# Altium PCB Digital temperature converter.PcbDoc
Units mm, origin at the board's own origin, x right, y up, seen from the top; angles counter-clockwise.
Board outline 40 x 25 mm, 2 copper layers (Top Layer, Bottom Layer), stack 1.65 mm thick; 8 components, 7 nets, 27 pads, 0 vias.
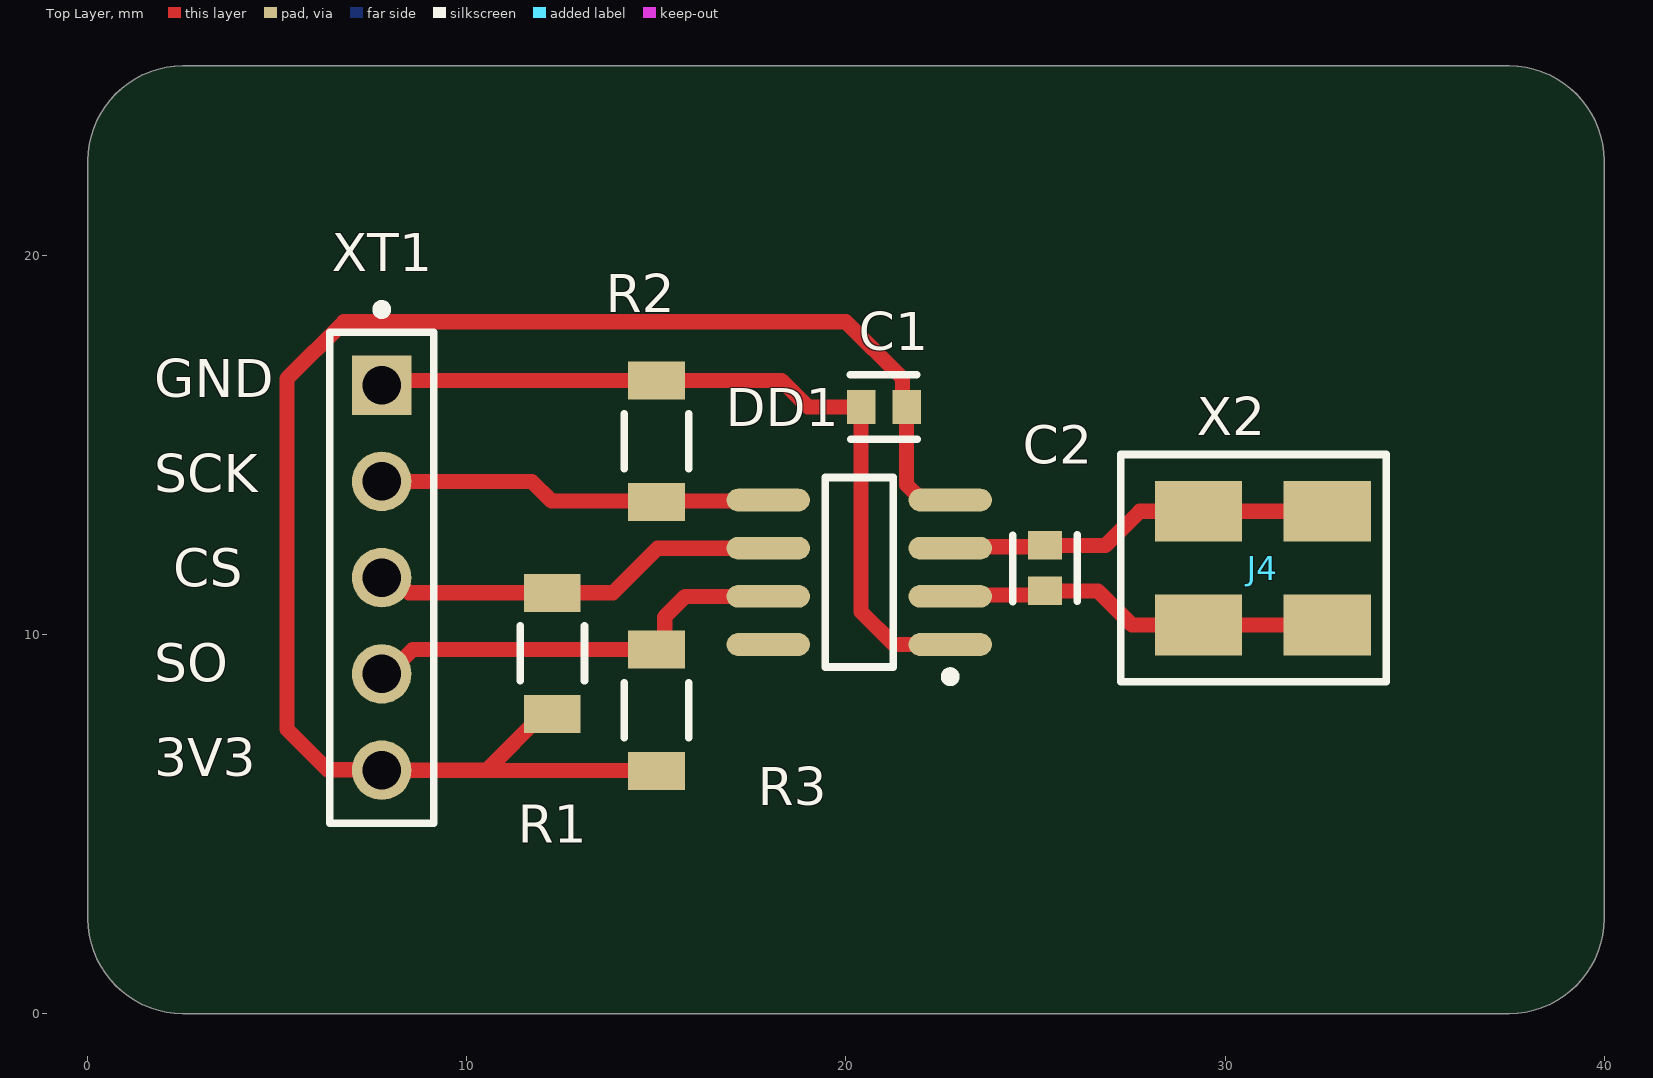
[diagram p0: Top Layer view]
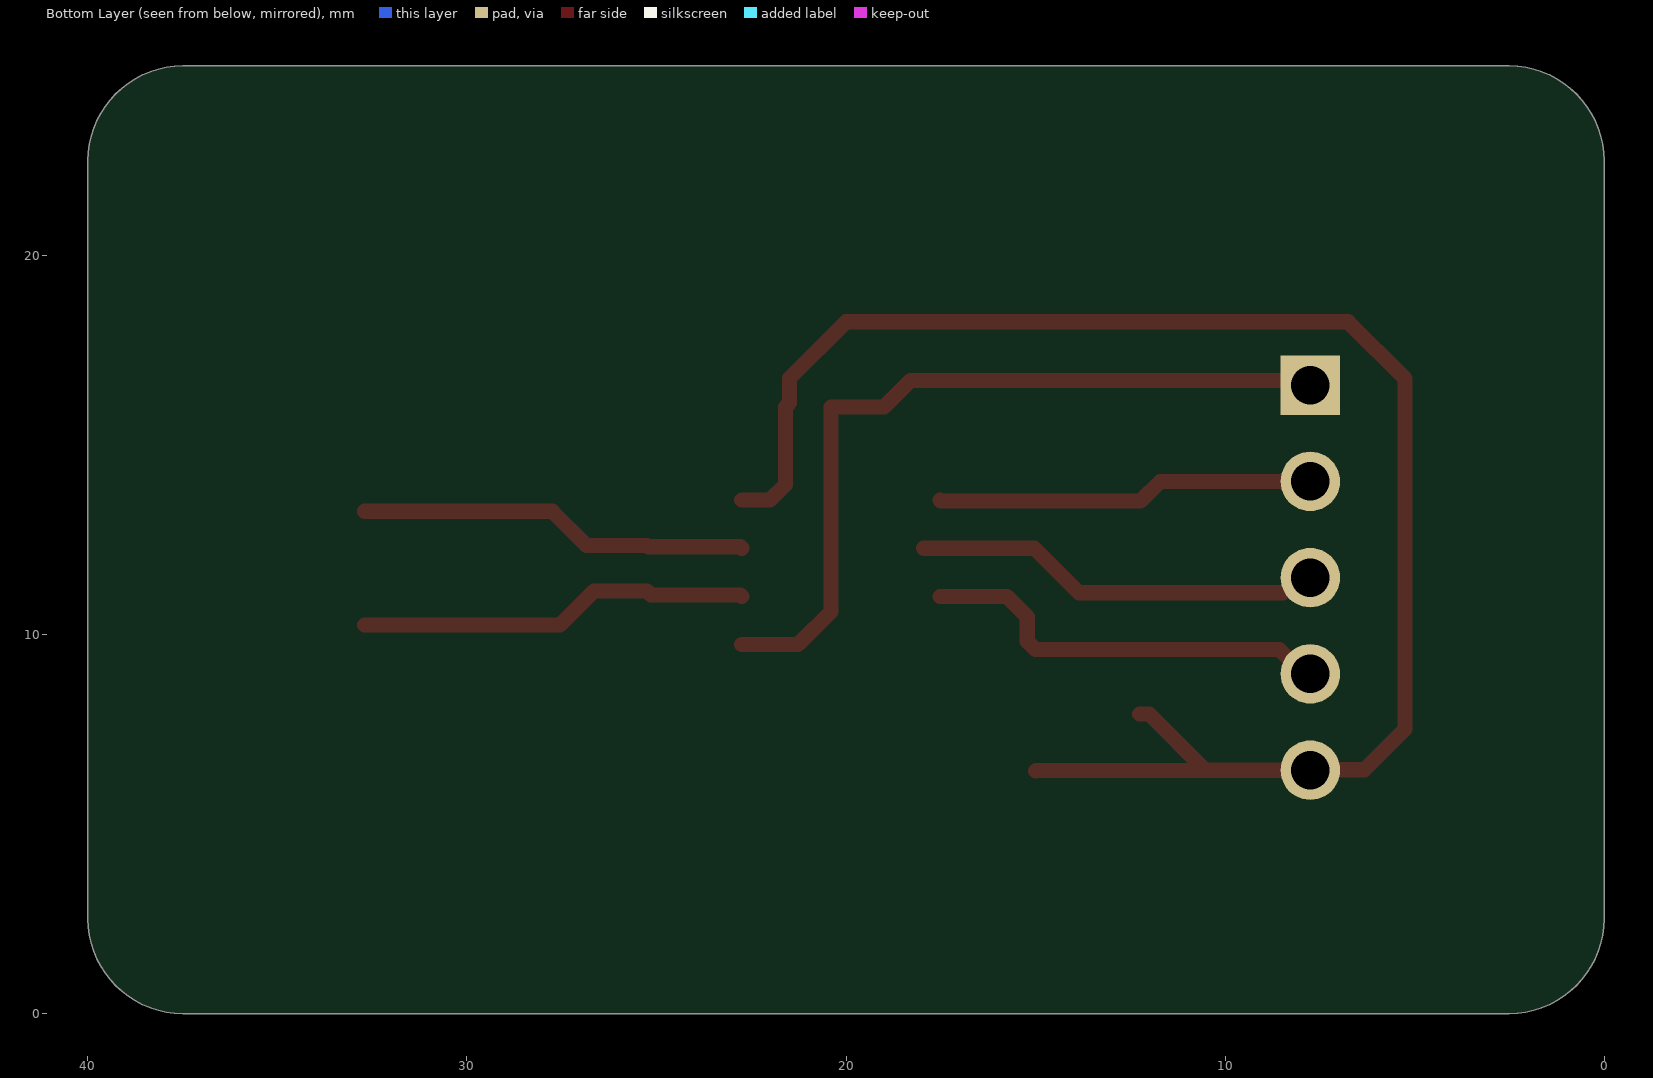
[diagram p1: Bottom Layer view, seen from below]
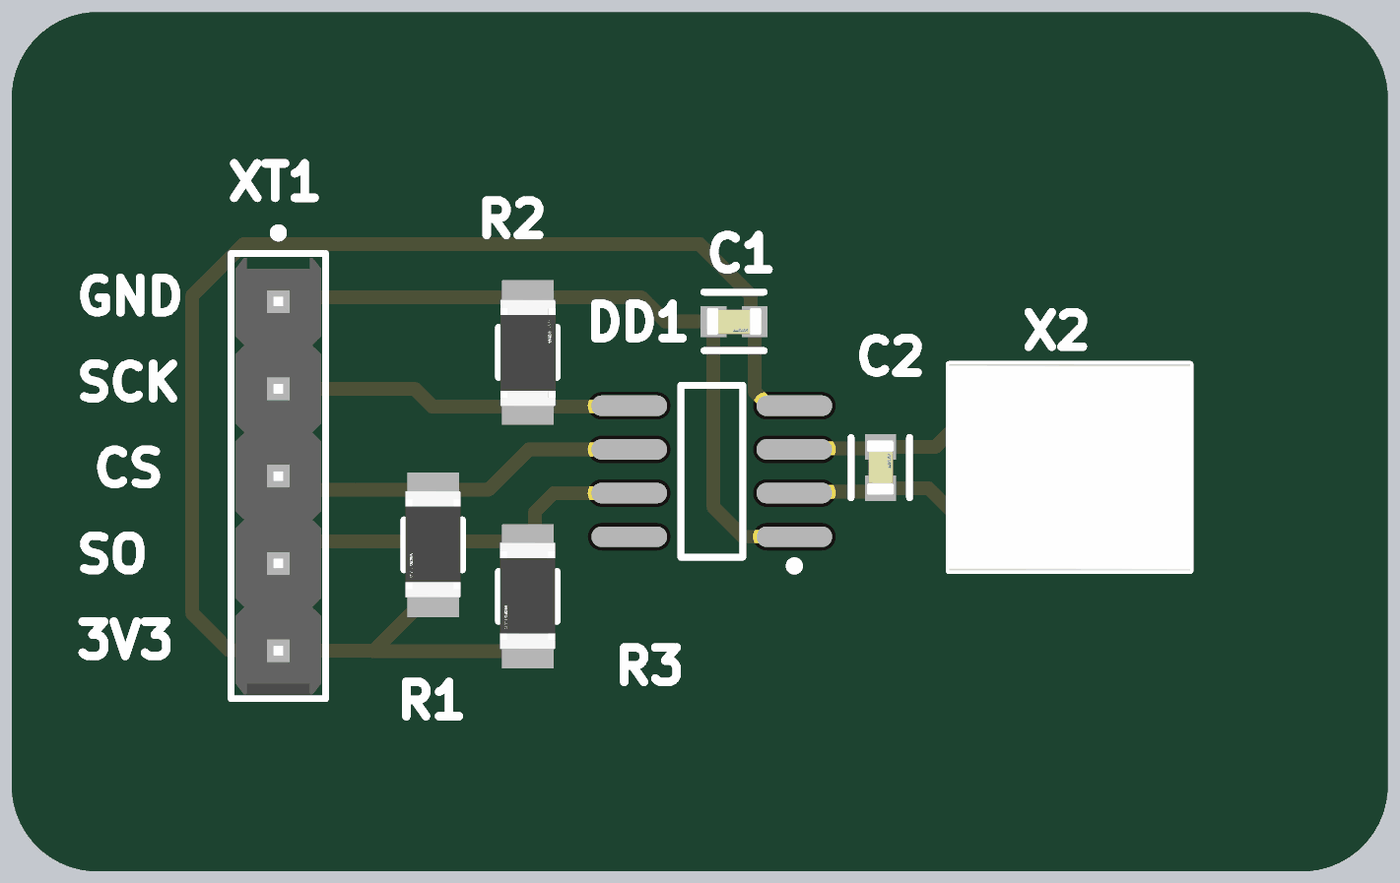
[diagram p2: 3D render of the assembled board from above, using the file's embedded part models]

## Layer stack, top to bottom
Top Solder: solder mask 0.05, Solder Resist, Dk 3.5
Top Layer: signal copper 0.05
Dielectric 1: dielectric 1.55, FR-4, Dk 4.8
Bottom Layer: signal copper 0.05
Bottom Solder: solder mask 0.05, Solder Resist, Dk 3.5

## Board outline
2.5,0 cw(c2.5,2.5) 0,2.5 0,22.5 cw(c2.5,22.5) 2.5,25 37.5,25 cw(c37.5,22.5) 40,22.5 40,2.5 cw(c37.5,2.5) 37.5,0

## Design rules (kind name [scope] priority, off if disabled: settings)
Clearance [All] p1: gap=0.15 ignorepadtopadclearanceinfootprint=FALSE
PolygonConnect [All] p1: connectstyle=Relief reliefconductorwidth=0.254 reliefentries=4 polygonreliefangle="90 Angle" airgapwidth=0.254
RoutingVias [All] p1: holewidth=0.6 width=1 viastyle="Through Hole" minholewidth=0.4 minwidth=0.8 maxholewidth=5 maxwidth=6
SolderMaskExpansion [All] p1: expansion=0.102 istentingtop=FALSE
SupplyNets "Schematic Supply Nets_1" [InNet('3V3')] p1: voltage=0.000
SupplyNets "Schematic Supply Nets" [InNet('GND')] p2: voltage=0.000
Width [All] p1: maxlimit=2 minlimit=0.2 preferedwidth=0.4
30 further rules are at their usual default settings.

## Classes and differential pairs
component class "Дяченко КП": C2 DD1 R1 R2

## Components (designator, comment, footprint, x,y, rotation, side; value= is the part's Value field where it differs from the comment)
C1 "100 nF 0603" FP-C0603C-CF-MFG 21,16 r180 top value="0.10 μF" (schematic designator C2)
C2 "10000pF 0603" FP-C0603C-CF-MFG 25.25,11.75 r270 top value="10,000 pF" (schematic designator C1)
DD1 "MAX31855KASA+T" MAXM-S8+4_N 20.35,11.642 r180 top (schematic designator U1)
J4 "009296002202906" "AVX 9296002202806" 30.75,11.75 r90 top
R1 "1206 10K" FP-RT1206-MFG 12.25,9.5 r270 top value=10KΩ
R2 "1206 10K" FP-RT1206-MFG 15,15.1 r90 top value=10KΩ (schematic designator R3)
R3 "1206 10K" FP-RT1206-MFG 15,8 r270 top value=10KΩ (schematic designator R2)
XT1 "22-28-4050" FP-22-28-4050-MFG 7.75,11.5 r270 top (schematic designator J1)

## Footprints (in the part's own frame and the unit in brackets; to place one, negate y for a bottom-side part, rotate by r counter-clockwise, add the part's x,y. Pads: shape width x height; smd on the part's side, far side on the other; paste and mask are expansions set on the pad)
"AVX 9296002202806" [mm] "POKE-HOME: LOW PROFILE HORIZONTAL"
  rect 1.6x2.3 smd: 1(-1.5,1.45) 1(-1.5,-1.95) 2(1.5,1.45) 22(1.5,-1.95)
  silkscreen extent -3,-3.5 3,3.5, body extent -3,-3.5 3,3.5, height 2.55
FP-22-28-4050-MFG [mm]
  rect 1.57x1.57 hole 1.02 paste-2539.97 mask+0: 1(-5.08,0)
  round 1.57 hole 1.02 paste-2539.97 mask+0: 2(-2.54,0) 3(0,0) 4(2.54,0) 5(5.08,0)
  silkscreen extent -7.2,-1.37 6.48,1.37, body extent -6.58,-1.47 6.58,1.47, height 0.25
FP-C0603C-CF-MFG [mm]
  rect 0.75x0.9 smd paste+0 mask+0: 1(-0.6,0) 2(0.6,0)
  silkscreen extent -0.87,-0.85 0.88,0.85, body extent -1.2,-0.6 1.2,0.6, height 0.25
FP-RT1206-MFG [mm]
  rect 1x1.5 smd paste+0 mask+0: 1(-1.6,0) 2(1.6,0)
  silkscreen extent -0.72,-0.85 0.72,0.85, body extent -2.2,-0.95 2.2,0.95, height 0.25
MAXM-S8+4_N [mm] "SOIC, 8-Leads, Body 4.9x3.9mm, Pitch 1.27mm, IPC Medium Density"
  oval 2.2x0.6 smd: 1(-2.4,1.905) 2(-2.4,0.635) 3(-2.4,-0.635) 4(-2.4,-1.905) 5(2.4,-1.905) 6(2.4,-0.635) 7(2.4,0.635) 8(2.4,1.905)
  silkscreen extent -2.53,-2.5 0.9,2.88, body extent -2,-2.5 2,2.5, height 1.75

## Part data
C1: library part CMP-2006-03811-3, "Capacitor; Ceramic; Cap; .100uF; Tol 10%; SMT; Vol-Rtg 16V; X7R; Tape and Reel", Capacitance="0.10 μF", Manufacturer=KEMET, Manufacturer Part Number=C0603C104K4RACTU, Package=C0603C-CF, Temperature="-55°C to +125°C", Temperature Characteristic=X7R, Temperature Coefficient=30ppm/°C, Temperature Range High=+125°C, Temperature Range Low=-55°C, Tolerance=0.1, Voltage Rating="16 V", Automotive=Yes, Automotive Grade="Grade 1", Category=Cap, ComponentLink2Description=Datasheet, ComponentLink2URL=https://api.kemet.com/component-edge/download/datasheet/C0603C100J5GACAUTO.pdf, Device Class L1="Passive Components", Device Class L2=Capacitors, Device Class L3="Ceramic Capacitors", Digikey Description="Capacitor; Ceramic; Cap; .100uF; Tol 10%; SMT; Vol-Rtg 16V; X7R; Tape and Reel", Height=0.87mm, Lead Free=Yes, Material=Ceramic, Mouser Description="Multilayer Ceramic Capacitors MLCC - SMD/SMT 16volts 0.1uF 10% X7R 10%", Octopart=https://octopart.com/c0603c104k4ractu-kemet-93067, RoHS=TRUE
C2: library part CMP-2006-03028-2, "CAP CER 10000PF 100V X7R 0603", Capacitance="10,000 pF", Manufacturer=KEMET, Manufacturer Part Number=C0603C103J1RACTU, Package=C0603C-CF, Temperature="-55°C to +125°C", Temperature Characteristic=X7R, Temperature Coefficient=30ppm/°C, Temperature Range High=+125°C, Temperature Range Low=-55°C, Tolerance=0.05, Voltage Rating="100 V", Automotive=Yes, Automotive Grade="Grade 1", Category=Cap, ComponentLink2Description=Datasheet, ComponentLink2URL=https://api.kemet.com/component-edge/download/datasheet/C0603C100J5GACAUTO.pdf, Device Class L1="Passive Components", Device Class L2=Capacitors, Device Class L3="Ceramic Capacitors", Digikey Description="CAP CER 10000PF 100V X7R 0603", Height=0.87mm, Lead Free=Yes, Material=Ceramic, Mouser Description="Multilayer Ceramic Capacitors MLCC - SMD/SMT 100volts 10000pF X7R 5%", Octopart=https://octopart.com/c0603c103j1ractu-kemet-91638, RoHS=TRUE
DD1: library part CMP-0253-00398-1, "Cold Junction Compensated Thermocouple to Digital Converter, 14 Bits Temperature Resolution, -40 to 125 degC, 8-Pin SOIC (S8+4), Pb-Free, Tape ang Reel", Generic Part Number=MAX31855, Code_JEDEC=MS-012, ComponentLink1Description="Manufacturer URL", ComponentLink1URL=http://www.maximintegrated.com/, ComponentLink2Description=Datasheet, ComponentLink2URL=http://datasheets.maximintegrated.com/en/ds/MAX31855.pdf, ComponentLink3Description="Package Specification", ComponentLink3URL=http://pdfserv.maximintegrated.com/package_dwgs/21-0041.PDF, DatasheetVersion="Rev. 2", Functions="Thermocouple-to-Digital Converter", Interface=SPI, Mounting Technology="Surface Mount", PackageDescription="8-Pin Small-Outline IC, Narrow, Body 3.9 x 4.9 mm, Pitch 1.27 mm", PackageReference=S8+4, PackageVersion="Rev. D, 10/2012", Packing="Tape ang Reel", Parasite Pwr.=No, PartNumber=MAX31855KASA+T
J4: "CONN WIRE POKE-IN 2POS SMD RA", Color=White, Manufacturer="AVX Corporation", Supplier Part Number 1=478-9533-1-ND, Board-Side Pitch="0.118\" (3.00mm)", Cable Pitch="0.118\" (3.00mm)", Cable Termination=Poke-In, ComponentLink1Description=Datasheet, ComponentLink1URL=http://datasheets.avx.com/PHLPHorizontal_00-9296.pdf, ComponentLink2Description="DigiKey Link", ComponentLink2URL=http://digikey.com/product-detail/en/avx-corporation/009296002202906/478-9533-1-ND/5161727, Connector Type="Individual Wires", Contact Finish=Tin, Features="Closed End", LastUpdated="01/05/2020 07:29:21", Lifecycle Status=Active, Minimum Order=1, Mounting Type="Surface Mount, Right Angle", Number of Positions=2, Number of Rows=1, Packaging=TapeAndReel, Part Number=009296002202906, Part Status=Active, Price=0.23, Series=9296, Supplier 1=DigiKey, Wire Gauge="20-26 AWG"
R1 R2 R3: library part CMP-2003-04268-2, "RES SMD 10K OHM 0.5% 1/4W 1206", Manufacturer=Yageo, Manufacturer Part Number=RT1206DRE0710KL, Package=RT1206, Power Rating=0.25W, Resistance=10KΩ, Temperature="-55°C to +155°C", Temperature Coefficient="50 ppm/°C", Temperature Range High=+155°C, Temperature Range Low=-55°C, Tolerance=0.0001, Voltage Rating=200V, Automotive=No, Category=Res, ComponentLink2Description=Datasheet, ComponentLink2URL=http://www.yageo.com/documents/recent/PYu-RT_1-to-0.01_RoHS_L_9.pdf, Composition="Thin Film", Device Class L1="Passive Components", Device Class L2=Resistors, Device Class L3="Chip SMD Resistors", Digikey Description="RES SMD 10K OHM 0.5% 1/4W 1206", Footprint Url=http://www.yageo.com/exep/pages/download/literatures/PYu-R_Mount_10.pdf, Height=0.65mm, Ipc Land Pattern Name=RESC310160X55, Lead Free=Yes, Octopart=https://octopart.com/rt1206dre0710kl-yageo-1219301, RoHS=TRUE, Series=RT
XT1: library part CMP-00257-00278173-1, "22-28-4050 KK® 254 Breakaway Header, Vertical, 5 Circuits, Tin (Sn) Plating, Mating Pin Length 6.09mm", Color=Black, Contact Resistance=20mΩ, Current Rating=4A, Flammability Rating="UL94 V-0", Max Operating Temperature=75°C, Max Voltage Rating (DC)=250.25kV, Min Operating Temperature=0°C, Voltage Rating=250V, Connector Type="Male Pin", Contact Material=Brass, Contact Mating Length=6.096mm, Contact Plating=Tin, Gender=Male, Glow Wire Compliant=Non-compliant, Height=2.29mm, Housing Color=Black, Housing Material=Thermoplastic, Lead Free="Lead Free", Lead Pitch=2.54mm, Length=12.7mm, Mount="Through Hole", NexarPartId=278173, Number of Circuits=5, Number of Contacts=5, Number of Positions=5, Number of Rows=1, Orientation=Vertical, Packaging=Bulk, Pitch=2.54mm, Radiation Hardening=No, REACH SVHC=Unknown, RoHS=Compliant, Schedule B=8536694040, Termination=Solder, Voltage Rating (DC)=250V, Width=2.49mm

## Nets (pads, with @x,y where several pads share a name; then routed paths per layer and width w, separated by ;. In a path a pad name is that pad's centre, name@x,y a point inside that pad or via, vN(x,y) a via of type N, cw(c..) or ccw(c..) an arc to the next point about the centre after c; other vN are vias at no path point)
3V3: C1.1 DD1.4 R1.2 R3.2 XT1.5 | length 43.5
  Top Layer w0.4: XT1.5@7.74,6.43 6.32,6.43 5.25,7.5 5.25,16.75 6.75,18.25 20,18.25 21.488,16.762 21.488,16.112 C1.1 21.6,13.951 22.004,13.547 DD1.4 ; XT1.5 10.52,6.42 ; R1.2 12,7.9 10.51,6.41 14.99,6.41 R3.2
GND: C1.2 DD1.1 R2.2 XT1.1 | length 21.1
  Top Layer w0.4: XT1.1 7.87,16.7 R2.2 18.3,16.7 19,16 C1.2 20.4,10.6 21.263,9.737 DD1.1
NetC1_1: C2.1 DD1.3 J4.2 J4.22 | length 10.4
  Top Layer w0.4: DD1.3 22.787,12.313 25.213,12.313 C2.1 26.85,12.35 27.75,13.25 J4.2 J4.22
NetC1_2: C2.2 DD1.2 J4.1 | length 10.4
  Top Layer w0.4: DD1.2 22.788,11.045 25.145,11.045 C2.2 26.65,11.15 27.55,10.25 29.3,10.25 J4.1@32.7,10.25
NetJ1_1: DD1.5 R2.1 XT1.2 | length 10
  Top Layer w0.4: XT1.2 11.71,14.04 12.227,13.523 17.5,13.523 DD1.5@17.523,13.547
NetJ1_2: DD1.7 R3.1 XT1.4 | length 11
  Top Layer w0.4: XT1.4 7.929,8.96 8.569,9.6 R3.1 15.216,9.816 15.216,10.466 15.757,11.007 DD1.7@17.523,11.007
NetJ1_3: DD1.6 R1.1 XT1.3 | length 10.9
  Top Layer w0.4: XT1.3 8.067,11.5 8.467,11.1 13.85,11.1 15.027,12.277 DD1.6
pads on no net: DD1.8

## Silkscreen, mask and mechanical layers (free items; w line width, h text height)
Top Overlay:
  text "GND" at 1.754,16.254 h1
  text "X2" at 29.254,15.254 h1
  text "SCK" at 1.754,13.754 h1
  text "CS" at 2.254,11.254 h1
  text "SO" at 1.754,8.754 h1
  text "3V3" at 1.754,6.254 h1
Mechanical 1:
  the board outline again, w0.254